# Altium PCB PCB1.PcbDoc
Units mil, origin at the board's own origin, x right, y up, seen from the top; angles counter-clockwise.
Board outline 2637.8 x 1850.39 mil, 2 copper layers (Top Layer, Bottom Layer); 65 components, 41 nets, 228 pads, 236 vias.
Unrouted connection lines stored in the file: 2.
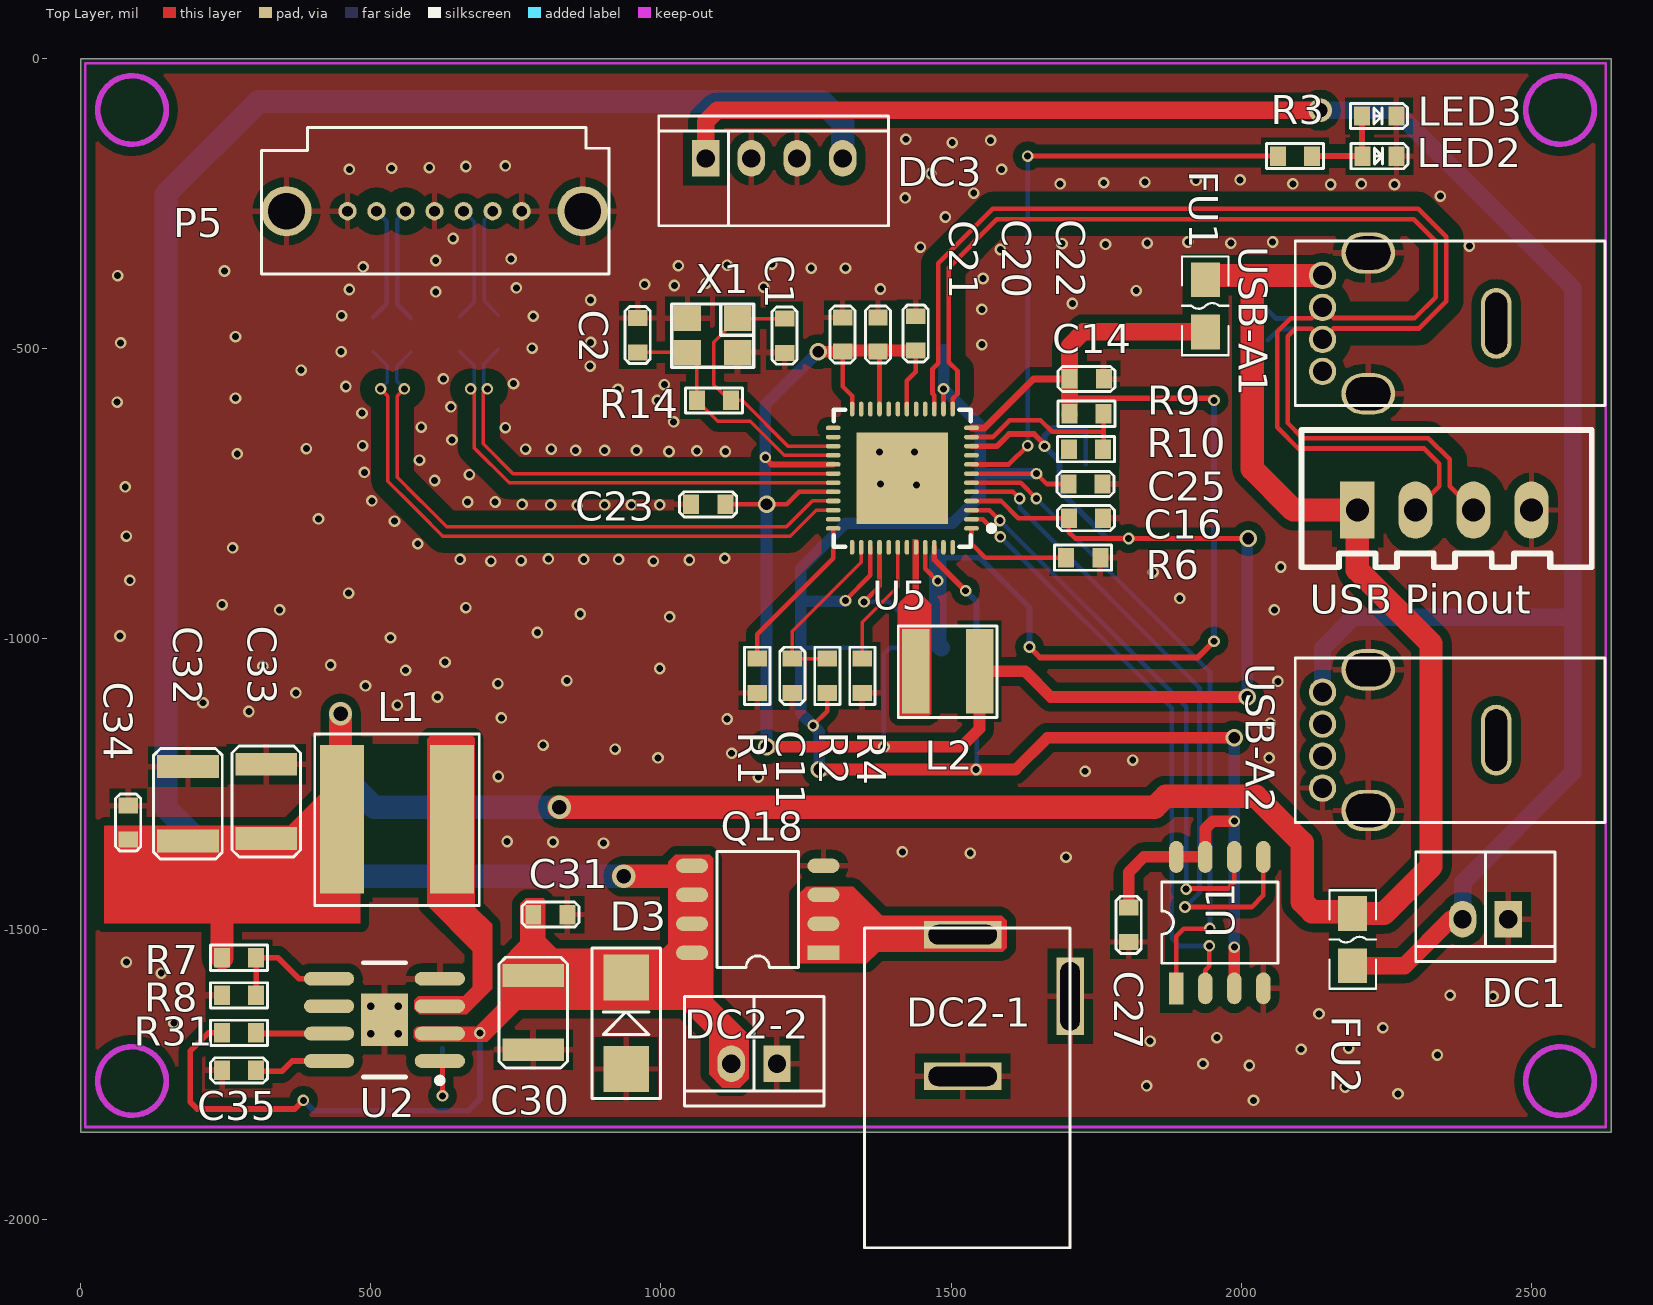
[diagram p0: Top Layer view]
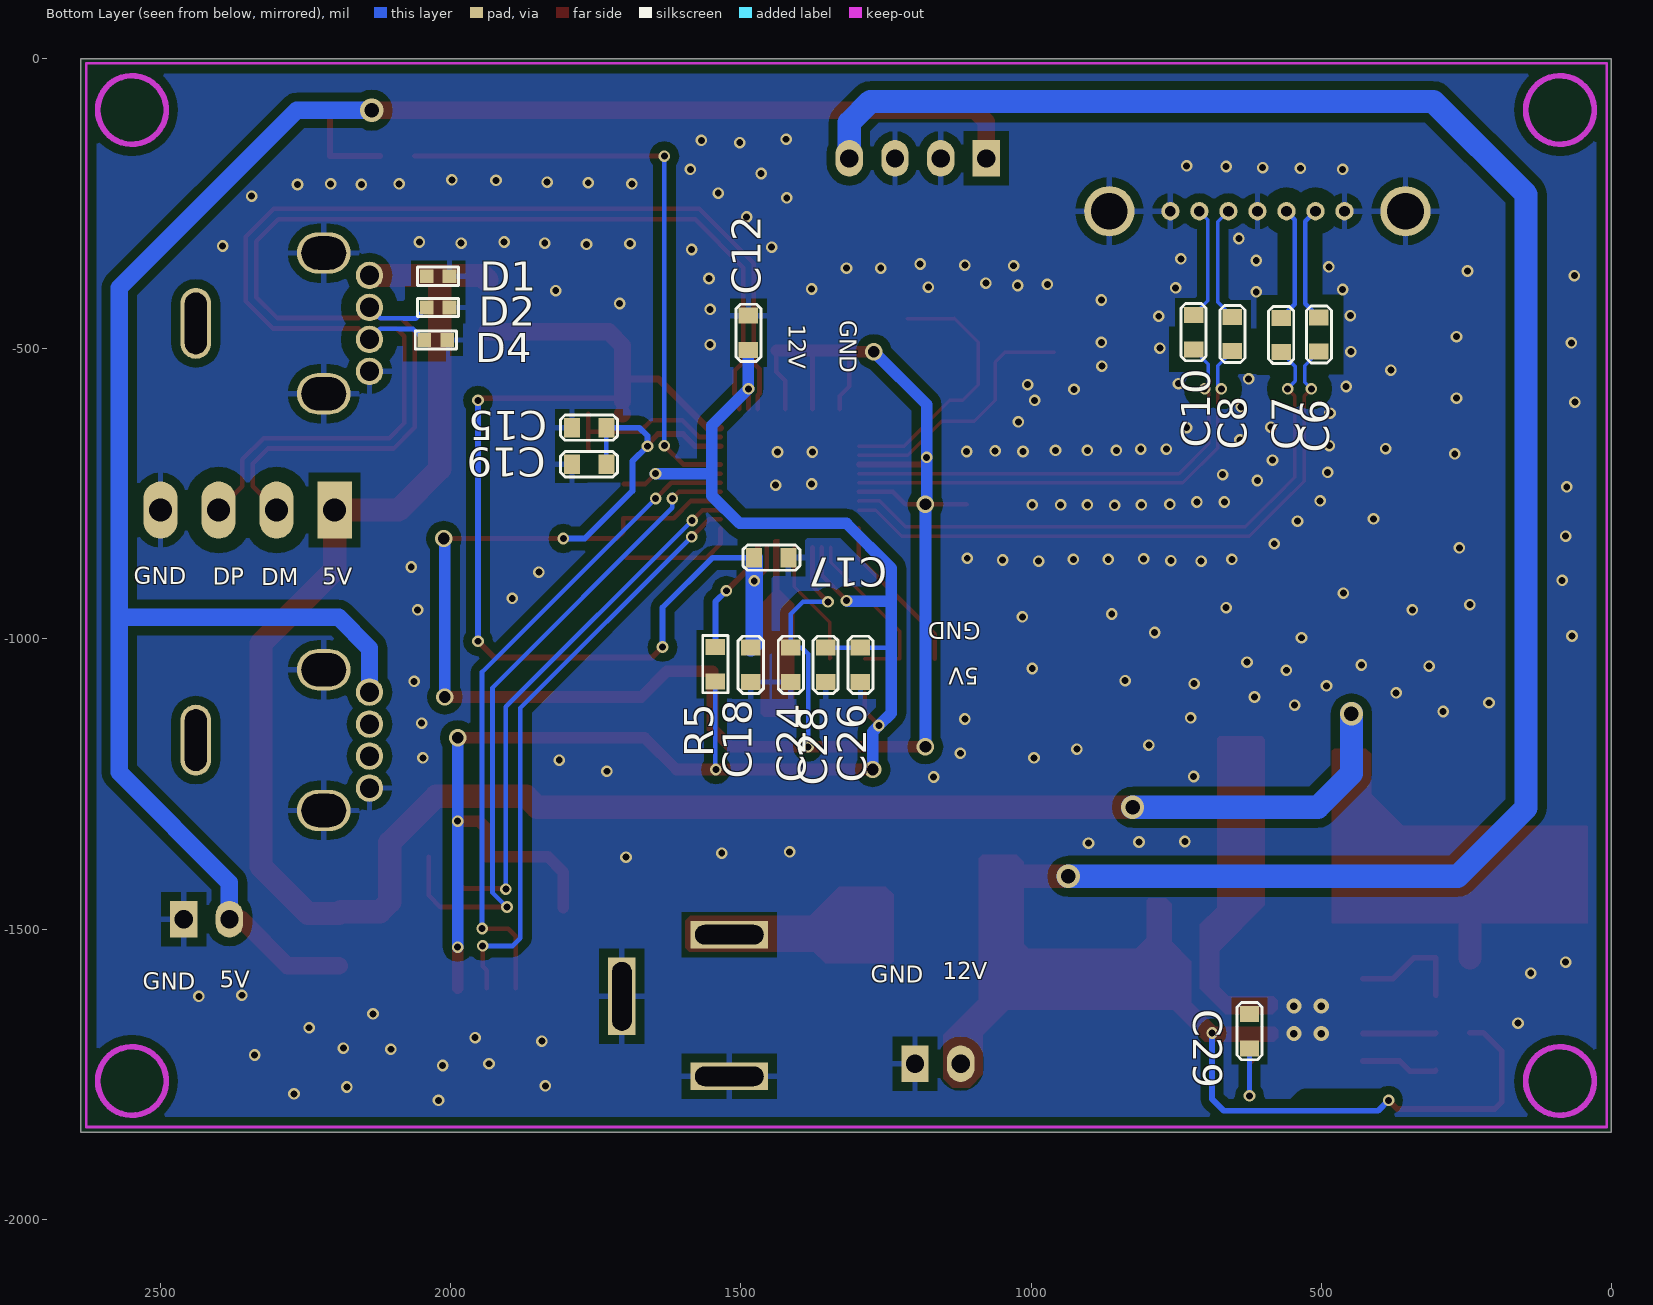
[diagram p1: Bottom Layer view, seen from below]

## Layer stack, top to bottom
Top Layer: signal copper 1.4
Dielectric: dielectric 12.6, FR-4, Dk 4.8
Bottom Layer: signal copper 1.4

## Board outline
0,-1850.39 2637.8,-1850.39 2637.8,0 0,0

## Design rules (kind name [scope] priority, off if disabled: settings)
Clearance hspeed [InNetClass('hspeed')] p1: gap=25
Clearance gnd [InPolygon] p2: gap=15
Clearance [All] p3: gap=5
DiffPairsRouting [All] p1: maxlimit=10 minlimit=6 mostfreqgap=10 maxuncoupledlength=500
MinimumSolderMaskSliver [All] p1: minsoldermaskwidth=1
PolygonConnect PolygonConnect_1 [IsVia] p1: connectstyle=Direct reliefconductorwidth=10 reliefentries=4 polygonreliefangle="90 Angle"
PolygonConnect [All] p2: connectstyle=Relief reliefconductorwidth=10 reliefentries=4 polygonreliefangle="90 Angle"
RoutingVias [All] p1: holewidth=28 width=50 viastyle="Through Hole" minholewidth=28 minwidth=50 maxholewidth=28 maxwidth=50
SilkToSilkClearance [All] p1: silktosilkclearance=1
SilkscreenOverComponentPads [All] p1: minsilkscreentomaskgap=1
SolderMaskExpansion [All] p1: expansion=4
Width [All] p1: maxlimit=300 minlimit=6 preferedwidth=10
24 further rules are at their usual default settings.

## Classes and differential pairs
net class hspeed: D_N D_P RX_N RX_P TX2_N TX2_P TX_N TX_P
component class power: C29 C30 C31 C32 C33 C34 C35 D3 FU1 FU2 L1 Q18 R7 R8 R31 U2
component class CPU: C1 C2 C11 C12 C14 C15 C16 C17 C18 C19 C20 C21 C22 C23 C24 C25 C26 C27 C28 L2 LED2 LED3 P6 R1 R2 R3 R4 R5 R6 R9 R10 R14 U1 U5 X1
component class CONNECTOR: C3 C4 C5 C6 C7 C8 C9 C10 D1 D2 D4 DC1 DC2-1 DC2-2 DC3 P1 P5 "USB Pinout" USB-A1 USB-A2
differential pair TX2: +TX2_P -TX2_N
differential pair RX2: +RX2_P -RX2_N
differential pair D: +D_P -D_N
differential pair TX: +TX_P -TX_N
differential pair RX: +RX_P -RX_N

## Components (designator, comment, footprint, x,y, rotation, side; value= is the part's Value field where it differs from the comment)
C1 "20pF" 0603c 1213,-507 r90 top
C2 "20pF" 0603C 960,-447 r270 top
C6 "0.01uF/25V" 0603C 504,-505 r90 bottom
C7 "0.01uF/25V" 0603C 569,-506 r90 bottom
C8 "0.01uF/25V" 0603C 653,-504.06 r90 bottom
C10 "0.01uF/25V" 0603C 720,-501 r90 bottom
C11 "1uF/25V" 0603C 1226.33,-1034 r270 top
C12 "0.1uF/25V" 0603C 1487,-502 r90 bottom
C14 "0.1uF/25V" 0603C 1704,-552 r0 top
C15 "10uF/25V" 0603C 1732,-636 r0 bottom
C16 "0.1uF/25V" 0603C 1703,-792 r0 top
C17 "10uF/25V" 0603C 1477,-860 r180 bottom
C18 "0.1uF/25V" 0603C 1483,-1015 r270 bottom
C19 "0.1uF/25V" 0603C 1732,-699 r0 bottom
C20 "0.1uF/25V" 0603C 1374,-505 r90 top
C21 "0.1uF/25V" 0603C 1313,-505.05 r90 top
C22 "0.1uF/25V" 0603C 1439,-503.05 r90 top
C23 "0.1uF/25V" 0603C 1111,-768 r180 top
C24 "0.1uF/25V" 0603C 1414,-1015 r270 bottom
C25 "0.1uF/25V" 0603C 1702,-733 r0 top
C26 "0.1uF/25V" 0603C 1294,-1015 r270 bottom
C27 "0.1uF/25V" 0603C 1806,-1463 r270 top
C28 "0.1uF/25V" 0603C 1354,-1015 r270 bottom
C29 "0.1uF/25V" 0603C 623.62,-1705.38 r90 bottom
C30 "100uF/25V" 1210C 780,-1580 r270 top
C31 "0.1uF/25V" 0603C 780,-1475 r0 top
C32 "100uF/25V" 1210C 185,-1348 r90 top
C33 "100uF/25V" 1210C 320,-1344 r90 top
C34 "0.1uF/25V" 0603C 82,-1346 r90 top
C35 "0.1uF/25V" 0603C 302.68,-1743.38 r180 top
D1 "PESD5V0S1UL" 0402R 2002,-375 r0 bottom
D2 "PESD5V0S1UL" 0402R 2002,-429 r0 bottom
D3 "SMAJ12CA" SMA 940,-1741 r90 top
D4 "PESD5V0S1UL" 0402R 2006,-485 r0 bottom
DC1 "DC1" 2X2MMZ 2460,-1483 r180 top
DC2-1 "DC2-1" DC005 1520,-2049 r90 top locked
DC2-2 "DC2-2" 2X2MMZ 1200,-1732 r180 top
DC3 "DC3" 2X4MMZ 1077,-172 r0 top
FU1 "SMD0805P100TF" F0805 1938,-381 r270 top
FU2 "SL0805300" F0805 2192,-1473 r270 top
L1 "XAL7030-103MEC" XAL7030 640,-1311 r180 top
L2 "NRS4012T4R7MDGJ" NRS4012T4R7MDGJ 1549,-1056 r180 top
LED2 "" 0603LED 2208.55,-168.22 r0 top
LED3 "" 0603LED 2208,-99 r0 top
P5 "Header 9" "SATA 7P" 460,-263 r0 top
Q18 "DTM4435" SO-8 1280,-1541 r180 top
R1 "12K/1%" 0603R 1166,-1034 r270 top
R2 "330K" 0603R 1286.67,-1034 r270 top
R3 "330" 0603R 2063,-168 r0 top
R4 "100K" 0603R 1347,-1034 r270 top
R5 "100K" 0603R 1544,-1014 r270 bottom
R6 "100K" 0603R 1697.94,-860 r0 top
R7 "44.2K/1%" 0603R 243.62,-1549.38 r0 top
R8 "10K/1%" 0603R 302.68,-1614.04 r180 top
R9 "100K" 0603R 1763,-612 r180 top
R10 "150K" 0603R 1703,-673 r0 top
R14 "1MR" 0603R 1062,-589 r0 top
R31 "100k" 0603R 302.68,-1678.71 r180 top
U1 "MX25L1006E" SO-8 1888,-1602 r90 top
U2 "FR9888SPG" SOP120P600-8N 523.62,-1656.38 r180 top
U5 "JMS578" QFN400P600-8N 1416,-723 r180 top locked
"USB Pinout" "USB Pinout" sip-4l 2200,-778 r0 top
USB-A1 "Header 6" USB-A-C 2140,-539 r90 top
USB-A2 "Header 6" USB-A-C 2140,-1257 r90 top
X1 "30MHz/20P" XTAL4TN_3225 1089,-477 r180 top

## Footprints (in the part's own frame and the unit in brackets; to place one, negate y for a bottom-side part, rotate by r counter-clockwise, add the part's x,y. Pads: shape width x height; smd on the part's side, far side on the other; paste and mask are expansions set on the pad)
2X2MMZ [mm]
  rect 1.2x1.6 hole 0.8: 1(0,0)
  oval 1.2x1.6 hole 0.8: 2(2,0)
  silkscreen extent -2.05,-2.95 4.05,1.85
2X4MMZ [mm]
  rect 1.2x1.6 hole 0.8: 1(0,0)
  oval 1.2x1.6 hole 0.8: 2(2,0) 3(4,0) 4(6,0)
  silkscreen extent -2.05,-2.95 8,1.85
0402R [mm]
  rect 0.6x0.6 smd: 1(0,0) 2(1,0)
  silkscreen extent -0.4,-0.4 1.4,0.4
0603c [mm]
  rect 0.7x0.85 smd: 1(0,0) 2(1.5,0)
  silkscreen extent -0.5,-0.55 2,0.55
0603C [mm]
  rect 0.7x0.85 smd: 1(0,0) 2(1.5,0)
  silkscreen extent -0.5,-0.55 2,0.55
0603LED [mm]
  rect 0.7x0.85 smd: 1(0,0) 2(1.5,0)
  silkscreen extent -0.5,-0.55 2,0.55
0603R [mm]
  rect 0.7x0.85 smd: 1(0,0) 2(1.5,0)
  silkscreen extent -0.5,-0.55 2,0.55
1210C [mm]
  rect 1x2.7 smd: 1(0,0) 2(3.25,0)
  silkscreen extent -0.8,-1.5 4.05,1.5
DC005 [mm]
  rect 3.4x1.2 hole 0.85 slot 3 at 0 deg: 2(11,-4.7)
  rect 1.2x3.4 hole 0.85 slot 3 at 90 deg: 3(7.5,0) 4(13.7,0)
  silkscreen extent 0,-4.7 14,4.3
F0805 [mil]
  rect 60x50 smd: 1(0,0) 2(90,0)
  silkscreen extent -40,-40 130,40, body extent 4,-23 82,24, height 20
NRS4012T4R7MDGJ [mm]
  rect 1.2x3.7 smd: 1(0,0) 2(2.8,0)
  silkscreen extent -0.76,-1.98 3.56,2.02
QFN400P600-8N [mm]
  oval 0.65x0.2 smd: 1(-3.025,2.2) 2(-3.025,1.8) 3(-3.025,1.4) 4(-3.025,1) 5(-3.025,0.6) 6(-3.025,0.2) 7(-3.025,-0.2) 8(-3.025,-0.6) 9(-3.025,-1) 10(-3.025,-1.4) 11(-3.025,-1.8) 12(-3.025,-2.2) 25(3.025,-2.2) 26(3.025,-1.8) 27(3.025,-1.4) 28(3.025,-1) 29(3.025,-0.6) 30(3.025,-0.2) 31(3.025,0.2) 32(3.025,0.6) 33(3.025,1) 34(3.025,1.4) 35(3.025,1.8) 36(3.025,2.2)
  oval 0.2x0.65 smd: 13(-2.2,-3.025) 14(-1.8,-3.025) 15(-1.4,-3.025) 16(-1,-3.025) 17(-0.6,-3.025) 18(-0.2,-3.025) 19(0.2,-3.025) 20(0.6,-3.025) 21(1,-3.025) 22(1.4,-3.025) 23(1.8,-3.025) 24(2.2,-3.025) 37(2.2,3.025) 38(1.8,3.025) 39(1.4,3.025) 40(1,3.025) 41(0.6,3.025) 42(0.2,3.025) 43(-0.2,3.025) 44(-0.6,3.025) 45(-1,3.025) 46(-1.4,3.025) 47(-1.8,3.025) 48(-2.2,3.025)
  rect 0x0 smd: 49(-0.85,0) 50(-0.35,0) 51(0,0.85) 52(0,0.35) 53(0.85,0) 54(0.35,0) 55(0,-0.85) 56(0,-0.35)
  rect 4x4 smd: 49(0,0)
  silkscreen extent -4.03,-3 3,3
"SATA 7P" [mm]
  round 0.8 hole 0.47: 1(0,0) 2(1.27,0) 3(2.54,0) 4(3.81,0) 5(5.08,0) 6(6.35,0) 7(7.62,0)
  round 2.2 hole 1.6: 8(10.29,0) 9(-2.67,0)
  silkscreen extent -3.76,-2.74 11.44,3.66
sip-4l [mm]
  rect 1.5x2.5 hole 1: 1(0,0)
  oval 1.5x2.5 hole 1: 2(2.54,0) 3(5.08,0) 4(7.62,0)
  silkscreen extent -2.44,-2.5 10.26,3.5
SMA [mm]
  rect 2x2 smd: 1(0,0) 2(4,0)
  silkscreen extent -1.3,-1.5 5.3,1.5
SO-8 [mil]
  rect 55x25 smd: 1(0,0)
  oval 55x25 smd: 2(0,-50) 3(0,-100) 4(0,-150) 5(226.38,-150) 6(226.38,-100) 7(226.38,-50) 8(226.38,0)
  silkscreen extent 43,-175 183,25
SOP120P600-8N [mm]
  oval 2.2x0.6 smd: 1(-2.425,1.8) 2(-2.425,0.6) 3(-2.425,-0.6) 4(-2.425,-1.8) 5(2.425,-1.8) 6(2.425,-0.6) 7(2.425,0.6) 8(2.425,1.8)
  rect 2.05x2.3 smd: 9(0,0)
  silkscreen extent -2.55,-2.5 0.93,2.77
USB-A-C [mm]
  round 1.2 hole 0.85: 1(4.2,0) 2(2.8,0) 3(1.4,0) 4(0,0)
  oval 1.8x2.35 hole 1.45 slot 1.95 at 90 deg: 5(-0.98,-2) 6(5.18,-2)
  oval 3.1x1.35 hole 0.95 slot 2.7 at 0 deg: 7(2.1,-7.6)
  silkscreen extent -1.5,-12.36 5.7,1.19
XAL7030 [mm]
  rect 1.92x6.5 smd: 1(0,0) 2(4.82,0)
  silkscreen extent -1.19,-3.74 6.01,3.76
XTAL4TN_3225 [mm]
  rect 1.2x1.1 smd: 1(-1.1,-0.75) 2(1.1,-0.75) 3(1.1,0.75) 4(-1.1,0.75)
  silkscreen extent -1.8,-1.38 1.79,1.4

## Part data
C1 C2: library part CAP, "Capacitor"
C6 C7 C8 C10 C11 C12 C14 C15 C16 C17 C18 C19 C20 C21 C22 C23 C24 C25 C26 C27 C28 C29 C30 C31 C32 C33 C34 C35: library part 0.01UF, "CCX85-103"
D1 D2 D4: library part "D Zener", "Zener Diode"
D3: library part "DIODE S", "Schottky Diode"
DC1 DC2-2: library part "Header 2", "Header, 2-Pin"
DC2-1 DC3 "USB Pinout": library part "Header 4", "Header, 4-Pin"
FU1 FU2: library part FUSE2, "Fuse"
L1 L2: library part INDUCTOR
LED2 LED3: library part LED
P5: "Header, 9-Pin"
Q18: library part Si4004DY, "Si4004DY"
R1 R2 R4 R5 R6 R7 R8 R14 R31: library part Res3, "Resistor"
R3 R9 R10: library part R, "R"
U1: library part M25P40-VMN6
USB-A1 USB-A2: "Header, 6-Pin"
X1: library part CRYSTAL_2

## Via types
v1: diameter 20, hole 12, Top Layer to Bottom Layer, tented both sides, 221 vias
v2: diameter 30, hole 20, Top Layer to Bottom Layer, tented both sides, 7 vias
v3: diameter 40, hole 25, Top Layer to Bottom Layer, tented both sides, 4 vias
v4: diameter 25.98, hole 12.99, Top Layer to Bottom Layer, tented top, 4 vias

## Nets (pads, with @x,y where several pads share a name; then routed paths per layer and width w, separated by ;. In a path a pad name is that pad's centre, name@x,y a point inside that pad or via, vN(x,y) a via of type N, cw(c..) or ccw(c..) an arc to the next point about the centre after c; other vN are vias at no path point)
CS: U1.1 U5.6 | length 1141.2
  Top Layer w8: U5.6 1619.87,-730.87 v1(1647,-758) ; U1.1 1888,-1512.34 1901.17,-1499.17 1945.83,-1499.17 v1(1946,-1499)
  Bottom Layer w8: v1(1647,-758) 1946,-1057 1946,-1235 v1(1946,-1499)
D_N: "USB Pinout.2" D2.2 U5.13 USB-A1.2 | length 2240.9
  Top Layer w8: U5.13 1502.61,-586.39 1511,-578 1511,-538.13 1495.87,-523 1495.87,-360.13 1579,-277 2297.46,-277 2335,-314.54 2335,-411 2299,-447 2177,-447 ; 2185,-447 2177,-447 ; 2300,-778 2341,-737 2341,-698 2315,-672 2098.54,-672 2062,-635.46 2062,-553 2062,-470.87 2085.54,-447.32 2121.44,-447.32 USB-A1.2 2158.24,-447 2177,-447
  Bottom Layer w8: D2.2 2060.37,-448 2081,-448 2081.68,-447.32 2121.44,-447.32 USB-A1.2
D_P: "USB Pinout.3" D4.2 U5.15 USB-A1.3 | length 2284.6
  Top Layer w8: U5.15 1471.12,-580.26 1467.87,-577 1467.87,-535 1477.87,-525 1477.87,-352.68 1571.54,-259 2304.92,-259 2353,-307.08 2353,-418.46 2306.46,-465 2158.88,-465 USB-A1.3 2121.44,-465.32 2093,-465.32 2080,-478.32 2080,-553 2080,-628 2106,-654 2322.46,-654 2359,-690.54 2359,-737 2400,-778
  Bottom Layer w8: D4.2 2064.37,-466 2088.46,-466 2089.13,-465.32 2121.44,-465.32 USB-A1.3
GND: "USB Pinout.4" C1.1 C2.1 C11.2 C12.2 C14.2 C15.2 C16.2 C17.2 C18.2 C19.2 C20.2 C21.2 C22.2 C23.2 C24.2 C25.2 C26.2 C27.2 C28.2 C30.2 C31.2 C32.2 C33.2 C34.2 C35.2 D1.1 D2.1 D3.1 D4.1 DC1.1 DC2-1.2 DC2-1.3 DC2-2.1 DC3.2 DC3.3 LED2.2 LED3.2 P5.1 P5.4 P5.7 P5.8 P5.9 Q18.4 R1.2 R4.2 R6.2 R8.2 R10.1 U1.4 U2.4 U2.9 U5.26 U5.43 U5.49 USB-A1.4 USB-A1.5 USB-A1.6 USB-A2.4 USB-A2.5 USB-A2.6 X1.2 X1.4
  other v1: 2021,-1795 2270,-1784 2179,-1772 1837,-1770 2014,-1735 1934,-1732 2338,-1717 2103,-1707 2185,-1705 1843,-1693 1958,-1687 2244,-1670 161,-1662 2134,-1646 2434,-1616 2360,-1614 139,-1576 79,-1557 1698,-1376 1533,-1369 1416,-1367 901,-1352 814,-1350 735,-1349 1168,-1238 720,-1237 1731,-1228 1813,-1209 995,-1205 2048,-1205 1122,-1197 921,-1190 797,-1183 2050,-1145 1114,-1138 725,-1136 290,-1125 546,-1114 211,-1110 615,-1100 371,-1093 491,-1081 719,-1077 2063,-1073 838,-1072 560,-1054 998,-1051 314,-1047 431,-1045 628,-1040 534,-998 68,-995 787,-989 1015,-962 861,-957 343,-950 2057,-950 664,-946 244,-941 1894,-930 462,-921 85,-899 1848,-885 2068,-876 707,-866 987,-866 759,-865 1049,-864 654,-863 867,-863 927,-863 806,-862 1110,-861 262,-843 581,-836 79,-823 541,-797 410,-793 856,-770 810,-769 903,-769 949,-769 998,-769 761,-768 667,-764 714.29,-764 502,-762 77,-738 1440,-735 1378,-733 610,-727 670,-717 489,-713 584,-692 270,-681 1377,-678 1437,-678 1014,-677 1111,-677 1062,-676 853,-675 903,-675 958,-675 767,-673 811,-673 389,-672 486,-667 640,-657 732,-636 587,-635 1022,-626 485,-611 638,-600 63,-592 994,-589 267,-585 926,-570 457,-565 1006,-562 746,-560 625,-552 380,-537 878,-530 449,-505 778,-499 1553,-493 69,-490 879,-489 267,-479 780,-444 450,-443 1553,-432 1709,-422 879,-416 612,-402 1819,-400 463,-398 1378,-397 751,-395 1177,-394 1023,-391 972,-389 1078,-387 1555,-379 64,-374 248,-366 1259,-361 1318,-361 487,-359 1030,-357 1114,-356 1191,-354 612,-348 742,-345 1585,-329 1447,-325 2393,-323 1766,-320 1691,-319 1838,-318 1982,-318 1908,-316 2054,-316 642,-310 1490,-273 1421,-240 2343,-237 1539,-232 2154,-217 2264,-217 1688,-216 2089,-216 2207,-216 1763,-214 1834,-213 1922,-210 1998,-209 1465,-198 463,-191 1587,-191 536,-189 601,-188 664,-186 732,-185 1502,-145 1568,-141 1422,-139
  other v4: 500,-1680 547.24,-1680 500,-1632.76 547.24,-1632.76
GPIO4: R3.1 U5.8 | length 1040.3
  Top Layer w8: U5.8 1599.62,-699.38 v1(1632,-667) ; v1(1632,-168) R3.1
  Bottom Layer w8: v1(1632,-667) v1(1632,-168)
GPIO5: U5.9
MISO: U1.2 U5.2 | length 1022.9
  Top Layer w8: U5.2 1554.87,-793.87 v1(1585,-824) ; U1.2 1938,-1571 1945,-1564 v1(1945,-1529)
  Bottom Layer w8: v1(1585,-824) 1880,-1119 1880,-1198 1880,-1516 1893,-1529 v1(1945,-1529)
MOSI: U1.5 U5.5 | length 1146
  Top Layer w8: U5.5 1606.62,-746.62 v1(1618,-758) ; v1(1903,-1462) 2018,-1462 2038,-1442 U1.5
  Bottom Layer w8: v1@1618,-752 v1(1618,-758) 1618,-774 1928,-1084 1928,-1437 v1(1903,-1462)
NetC1_2: C1.2 R14.2 U5.27 X1.1 | length 462.5
  Top Layer w6: C1.2 1132.78,-447.94 X1.1 1091,-488.78 1091,-562.35 1117.65,-589 R14.2 1140,-589 1218.88,-667.88 U5.27
NetC2_2: C2.2 R14.1 U5.28 X1.3 | length 449.2
  Top Layer w6: C2.2 1045.22,-506.06 X1.3 1062,-522.83 R14.1 1098,-625 1154,-625 1212.63,-683.63 U5.28
NetC11_1: C11.1 R2.1 U5.38 | length 301.4
  Top Layer w6: R2.1 C11.1 1226.33,-986.67 1345.13,-867.87 U5.38
NetC29_1: C29.1 U2.1 | length 144.9
  Top Layer w8: U2.1 623.62,-1731.77 v1(623.62,-1787.38)
  Bottom Layer w8: v1@623,-1788 v1(623.62,-1787.38) C29.1
NetC29_2: C29.2 L1.1 U2.3
NetC35_1: C35.1 U2.8 | length 133.5
  Top Layer w10: C35.1 304.3,-1745 347,-1745 364.76,-1727.24 U2.8
NetL2_2: L2.2 U5.44
NetLED2_1: LED2.1 LED3.1 R3.2 | length 155.7
  Top Layer w10: R3.2 LED2.1@2208.33,-168 ; LED3.1 2208,-167.67 LED2.1@2208.33,-168 ; LED2.1 LED2.1@2208.33,-168
NetR1_1: R1.1 U5.36 | length 278.6
  Top Layer w8: R1.1 1166,-991.98 1296.91,-861.08 U5.36
NetR4_1: R4.1 U5.42 | length 219.9
  Top Layer w6: R4.1@1345.13,-1032.13 R4.1 1347,-971 1408.13,-909.87 U5.42
NetR5_1: R5.1 U5.46 | length 202.1
  Top Layer w10: U5.46 1471.12,-863.12 v1(1525,-917)
  Bottom Layer w10: v1(1525,-917) 1544,-936 R5.1
NetR6_1: R6.1 U5.1 | length 199.2
  Top Layer w8: U5.1 1535.09,-836.09 1559,-860 R6.1
NetR7_2: R7.2 R8.1 U2.5 | length 205.1
  Top Layer w10: R8.1 R7.2 340.38,-1549.38 376.51,-1585.51 U2.5
NetR9_1: R9.1 R10.2 U5.11 | length 310.5
  Top Layer w8: U5.11 1571.87,-652.13 1601,-623 1654,-623 1674,-643 1761,-643 1763,-645 ; R10.2 1763,-672.06 1763,-645 ; R9.1 1763,-645
NetR31_1: R31.1 U2.7 | length 126
  Top Layer w10: R31.1 303.97,-1680 U2.7
RX2_N: C8.2 P5.5 | length 200.2
  Bottom Layer w6: C8.2 678.5,-419.5 678.5,-281.5 P5.5
RX2_P: C10.2 P5.6 | length 195.1
  Bottom Layer w6: P5.6 695.5,-277.5 695.5,-417.44 C10.2
RX_N: C8.1 U5.31 | length 826.7
  Top Layer w6: v1(672,-569) 678,-575 678,-670.63 738.5,-731.13 U5.31@1296.65,-731.13 ; U5.31@1296.65,-731.13 U5.31 U5.31@1296.65,-731.13
  Bottom Layer w6: C8.1 678.5,-529.56 678.5,-562.5 v1(672,-569)
RX_P: C10.1 U5.30 | length 803.2
  Top Layer w6: v1(701,-569) 694,-576 694,-664 745.13,-715.13 U5.30
  Bottom Layer w6: v1(701,-569) 694.5,-562.5 694.5,-526.5 C10.1
RXD: U5.48
SCK: U1.6 U5.3 | length 955.6
  Top Layer w8: U5.3 1566.12,-778.12 v1(1584,-796) ; v1(1905,-1431) 1906,-1430 1977,-1430 1988,-1419 U1.6
  Bottom Layer w8: v1(1584,-796) 1905,-1117 v1(1905,-1431)
TX2_N: C7.2 P5.3 | length 199.7
  Bottom Layer w8: P5.3 545.5,-277.5 545.5,-423.44 C7.2
TX2_P: C6.2 P5.2 | length 199.9
  Bottom Layer w8: C6.2 527.5,-422.45 527.5,-280.5 P5.2
TX_N: C7.1 U5.33 | length 1084.1
  Top Layer w6: v1(558,-569) 545.5,-581.5 545.5,-721.5 586.37,-762.37 ; 563,-739 600.69,-776.69 ; 594.5,-770.5 631,-807 1216.37,-807 1261.25,-762.12 U5.33@1296.65,-762.12 ; U5.33@1296.65,-762.12 U5.33 U5.33@1296.65,-762.12
  Bottom Layer w6: v1(558,-569) 544.5,-555.5 544.5,-530.5 C7.1
TX_P: C6.1 U5.34 | length 1123.9
  Top Layer w6: v1(517,-569) 529.5,-581.5 529.5,-728.13 579.74,-778.37 ; 551.69,-750.31 594.06,-792.69 ; 583.19,-781.81 624.37,-823 1223,-823 1267.88,-778.12 U5.34 U5.34@1296.65,-778.37
  Bottom Layer w6: C6.1 528.5,-529.5 528.5,-557.5 v1(517,-569)
TXD: U5.37
VBUS: C14.1 C17.1 C18.1 FU1.2 R9.2 U5.12 U5.45 | length 2034.9
  Top Layer w8: U5.45 1455.37,-879.37 v1@1477,-901
  Top Layer w10: v1(1635,-1014) 1653,-1032 1925,-1032 v1(1953,-1004) ; 1704,-590.35 1709.08,-585.27 1949.27,-585.27 v1(1953,-589)
  Top Layer w12: U5.12 1557.61,-636.39 1642,-552 C14.1
  Top Layer w30: R9.2 R9.2@1704,-611.94 ; 1704,-590.35 C14.1 1704,-495 1728,-471 FU1.2
  Bottom Layer w10: C17.1 1549,-860 1635,-946 v1(1635,-1014) ; v1(1953,-1004) v1(1953,-589)
  Bottom Layer w30: C17.1 v1(1477,-900) 1477,-1009 C18.1
VCC: C30.1 C31.1 D3.2 DC2-2.2 DC3.4 Q18.5 Q18.6 Q18.7 Q18.8 R31.2 U2.2 | length 4115.6
  Top Layer w10: R31.2 220.29,-1678.71 189,-1710 189,-1798 201,-1810 369,-1810 v1(384,-1795)
  Top Layer w40: v3(936,-1409) 1052,-1409
  Bottom Layer w10: v1(384,-1795) 402,-1813 614,-1813 668,-1813 688,-1793 v1(688,-1679)
  Bottom Layer w40: v3(936,-1409) 265,-1409 147,-1291 147,-234 307,-74 1276.83,-74 1313.22,-110.39 DC3.4
VCC_1.2V: C15.1 C16.1 C19.1 C20.1 C21.1 C22.1 C23.1 C24.1 L2.1 U5.4 U5.10 U5.18 U5.21 U5.24 U5.29 U5.32 U5.40 | length 4246.4
  Top Layer w8: C23.1 v2(1182,-768) 1216.62,-768 1238,-746.62 U5.32 ; C21.1 1313,-565 1329.39,-581.39 U5.24 ; v1(1350,-936) 1376.63,-909.37 U5.40 ; C20.1@1373.94,-505.05 C20.1 1376.63,-507.63 U5.21 ; U5.18 1423.87,-555.13 1439,-540 C22.1 C22.1@1437.05,-505 ; U5.4 1586.37,-762.37 1616,-792 C16.1 1703,-816 1714,-827 v1(1806,-827) v2(2012,-827)
  Top Layer w10: v1(1180,-687) 1178,-687 1190.38,-699.38 U5.29 ; U5.10 1579.12,-667.88 1600,-647 1643,-647 1661,-665 v1(1661,-668)
  Top Layer w20: v2(1182,-1186) 1518,-1186 1549,-1155 L2.1 1628,-1056 1672,-1100 v2(2010,-1100) ; v2@1271.05,-505.05 C21.1 1315,-503.05 C22.1
  Bottom Layer w8: v1(1350,-936) 1393,-936 1414,-957 C24.1 1395,-1015 1384,-1026 v1@1384,-1186 ; C19.1 C15.1
  Bottom Layer w10: C15.1 1675,-636 1661,-650 v1(1661,-668) 1687,-694 1687,-745 1769,-827 v1(1806,-827)
  Bottom Layer w20: v2@1180,-768 v1(1180,-687) 1180,-596 v2(1271,-505) ; v2(1182,-1186) v2(1182,-768) ; v2(2010,-1100) v2@2010,-827
  other v1: 1384.35,-1186
VCC_5V: "USB Pinout.1" C32.1 C33.1 C34.1 D1.2 FU1.1 FU2.1 L1.2 R7.1 USB-A1.1 | length 3969.6
  Top Layer w40: 239.11,-1372.63 243.62,-1377.13 R7.1 ; v3(448,-1129) 448,-1308.76 L1.2 L1.2@450,-1310.76 ; v3@824,-1289 v3(825.02,-1290.02) 1850.98,-1290.02 1870,-1271 2025,-1271 2105,-1351 2105,-1453 2122,-1470 2189,-1470 FU2.1 2246,-1473 2327,-1392 2327,-1008 2200,-881 2200,-778 2090,-778 2019,-707 2019,-373.65 ; FU1.1 1945.35,-373.65 2019,-373.65 ; USB-A1.1 2019,-373.65
  Bottom Layer w40: v3(448,-1129) 448,-1232 506.02,-1290.02 v3(825.02,-1290.02)
VCC_IN: DC2-1.4 Q18.1 Q18.2 Q18.3
VCCO: C12.1 C25.1 C26.1 C27.1 C28.1 R2.2 R5.2 U1.3 U1.7 U1.8 U5.7 U5.14 U5.39 | length 3296.3
  Top Layer w8: v1@1262.06,-1149.06 1286.67,-1124.46 R2.2 ; v1@1318,-933 1360.88,-890.12 U5.39 ; U5.14 v1(1486.87,-569.13) ; U5.7 v1(1647.13,-715.13) 1665,-733 C25.1
  Top Layer w20: v2(1273,-1225) v1(1543,-1225) 1611,-1225 1666,-1170 v2(1988,-1170) ; C27.1 1806,-1402 1832.38,-1375.62 U1.8 U1.7 1938,-1327 1951,-1314 v1(1988,-1314) ; U1.3 v1(1988,-1531)
  Bottom Layer w8: 1241,-1011 1245,-1015 C26.1 C28.1 ; v1@1544,-1224 R5.2
  Bottom Layer w20: v2(1273,-1225) 1273,-1160 v1(1262.25,-1149.25) 1241,-1128 1241,-1011 1241,-935 ; v1@1317,-935 1241,-935 ; v1(1486.87,-569.13) 1550,-632.27 1550,-753 1502,-801 1318,-801 1241,-878 1241,-935 ; v1@1487,-569 C12.1 ; 1552.13,-715.13 v1(1647.13,-715.13) ; v1(1988,-1531) v1(1988,-1314) v2(1988,-1170)
  other v1: 1318,-934
VOUT_5V: DC1.2 DC3.1 FU2.2 USB-A2.1 | length 3694.9
  Top Layer w30: DC3.1 1077,-109 1097,-89 v3(2136,-89) ; FU2.2 2281.24,-1563 2361.24,-1483 DC1.2
  Bottom Layer w30: v3(2136,-89) 2265,-89 2571,-395 2571,-966 ; USB-A2.1@2145,-1086.65 USB-A2.1 2140,-1016 2193,-963 2446,-963 ; DC1.2 2381.26,-1419.74 2571,-1230 2571,-966 ; 2523,-963 2446,-963 ; 2446,-963 2568,-963 2571,-966
pads on no net: U2.6 U5.16 U5.17 U5.19 U5.20 U5.22 U5.23 U5.25 U5.35 U5.41 U5.47 U5.50 U5.51 U5.52 U5.53 U5.54 U5.55 U5.56 USB-A1.7 USB-A2.2 USB-A2.3 USB-A2.7

## Polygon pours and split planes (outlines as drawn)
GND on Top Layer "Top Layer-No Net" (solid, remove dead copper): -287.55,199.95 2766.45,199.95 2787.45,220.95 2730.45,163.95 2730.45,-2000.05 -343.55,-2000.05 -486.55,-1857.05 -166.55,-1537.05 -166.55,192.95
GND on Bottom Layer "Top Layer-No Net" (solid, remove dead copper): -142,150 -127,135 2805,135 2805,-1976 2830,-2001 2801,-2030 -171,-2030 -171,12 -28,155

## Keep-outs
Keep-Out Layer:
  circle w10: c2549.21,-1761.81 r59.06
  circle w10: c2549.21,-88.58 r59.06
  circle w10: c88.58,-1761.81 r59.06
  circle w10: c88.58,-88.58 r59.06
  lines w5: 8,-1841 8,-8 2628,-8 2628,-1841 8,-1841

## Other copper
Top Layer:
  pour cut-out: 1536,-978 1544,-986 1544,-1123.48 1533,-1129 1464,-1129 1452,-1117 1452,-978
  pour cut-out: 482,-1180 483,-1181 604,-1181 604,-1444 606,-1446 480,-1446 480,-1182
  region net NetL2_2: 1434,-828 1442,-828 1444,-830 1444,-918 1466,-940 1466,-1129 1461,-1134 1410,-1134 1408,-1132 1408,-940 1434,-914
  region net VCC_5V: 41.94,-1322 359,-1322 414,-1267 414,-1198 423,-1189 478,-1189 482,-1193 482,-1490 40.94,-1490 40.94,-1323
  region net NetC29_2: 584,-1647 665,-1647 709,-1603 709,-1492 679,-1462 679,-1171 676,-1168 602,-1168 597,-1173 597,-1459 676,-1538 676,-1599 659,-1616 582,-1616 575,-1623 575,-1638
  region net VCC: 579,-1668 682,-1668 724,-1626 724,-1555 758,-1521 758,-1456 767,-1447 798,-1447 801,-1450 801,-1515 820,-1534 1004,-1534 1013,-1525 1013,-1384 1025,-1372 1084,-1372 1090,-1378 1090,-1621 1151,-1682 1151,-1758 1136,-1773 1106,-1773 1083,-1750 1083,-1683 1039,-1639 756,-1639 701,-1694 581,-1694 574,-1687 574,-1673
  region net VCC_IN: 1250,-1427 1331,-1427 1381,-1477 1587,-1477 1596,-1486 1596,-1532 1589,-1539 1375,-1539 1355,-1559 1239.81,-1559 1236.81,-1556 1236.81,-1440.19

## Silkscreen, mask and mechanical layers (free items; w line width, h text height)
Bottom Overlay:
  text "GND" at 1340,-451.05 h50 r90
  text "12V" at 1428,-458.05 h50 r90
  text "GND" at 2546,-916 h50
  text "5V" at 2221,-917 h50
  text "DP" at 2410,-917 h50
  text "DM" at 2326.39,-918.06 h50
  text "GND" at 1087,-961 h50 r180
  text "5V" at 1090.05,-1039.32 h50 r180
  text "12V" at 1152,-1597 h50
  text "GND" at 1276,-1603 h50
  text "5V" at 2398,-1611 h50
  text "GND" at 2531,-1615 h50
Mechanical 1:
  circle w10: c2549.21,-1761.81 r59.06
  circle w10: c2549.21,-88.58 r59.06
  circle w10: c88.58,-1761.81 r59.06
  circle w10: c88.58,-88.58 r59.06
  lines w5: 0,-1850.39 2637.8,-1850.39 2637.8,0 0,0 0,-1850.39